# Altium PCB 3d Printer Control PCB.PcbDoc
Units mil, origin at the board's own origin, x right, y up, seen from the top; angles counter-clockwise.
Board outline 6000 x 4000 mil, 2 copper layers (Top Layer, Bottom Layer); 30 components, 35 nets, 131 pads, 56 vias.
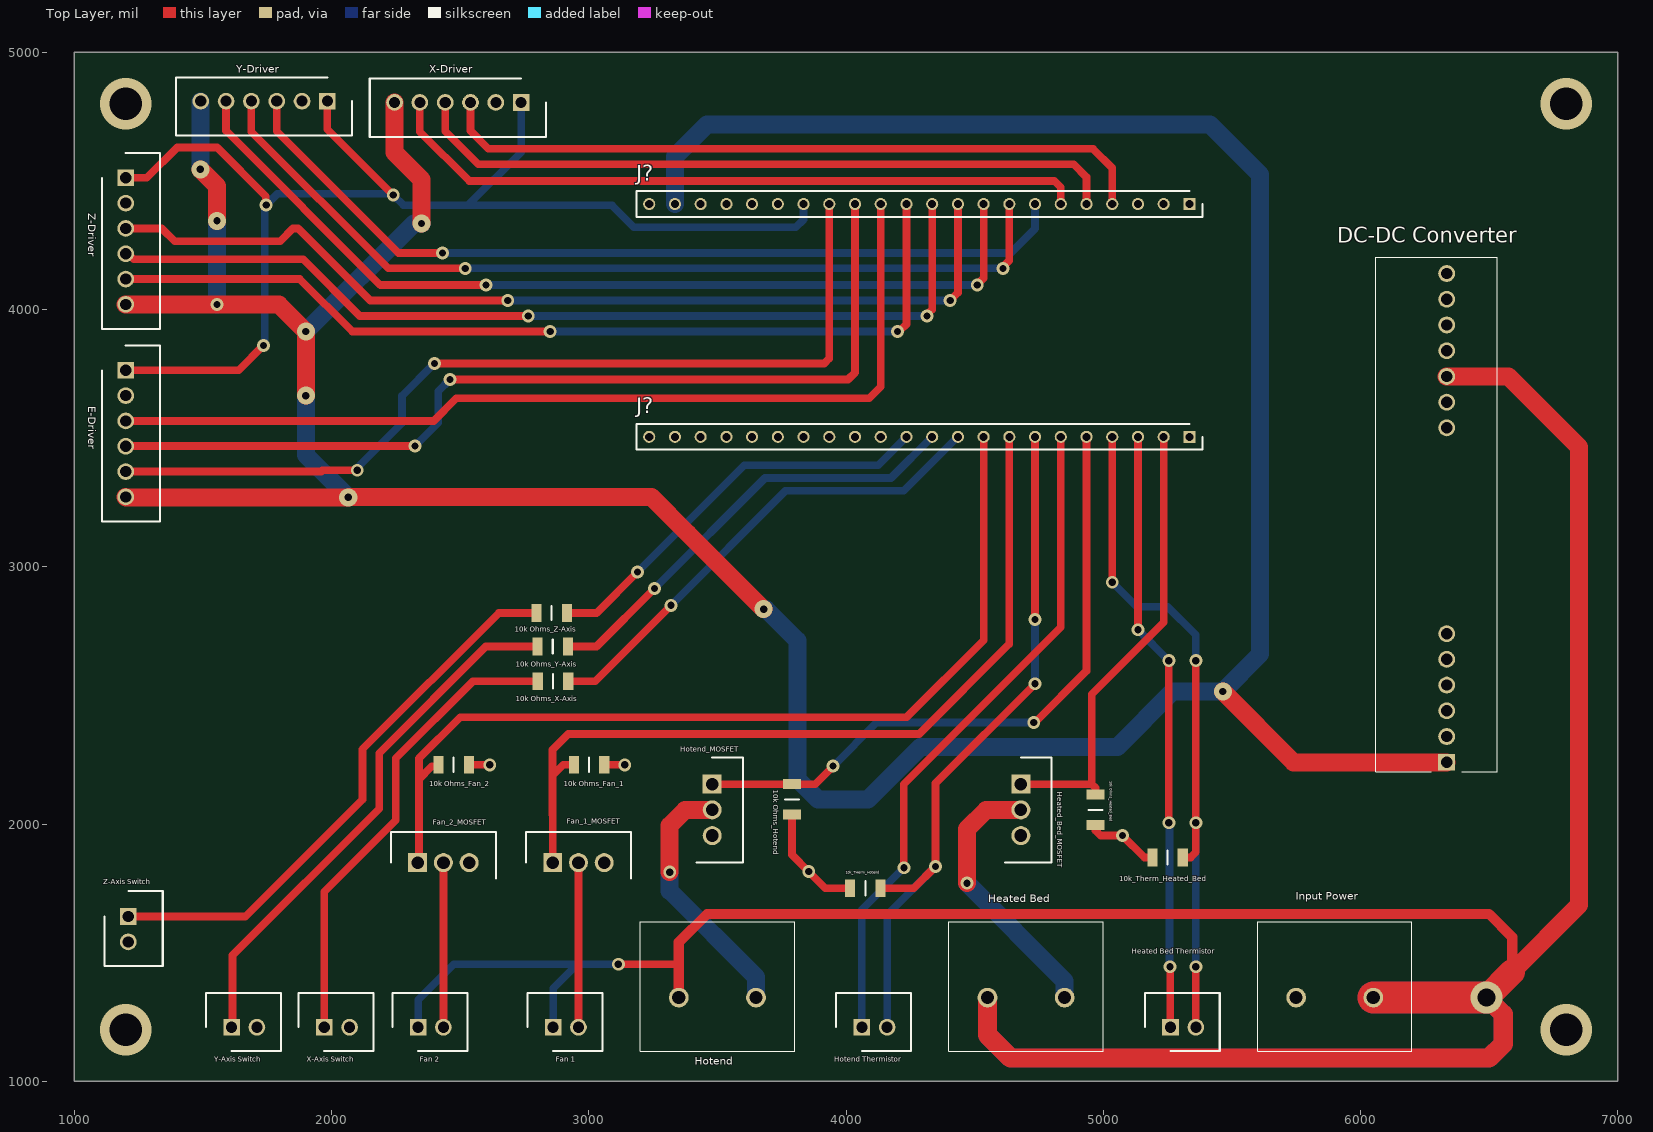
[diagram p0: Top Layer view]
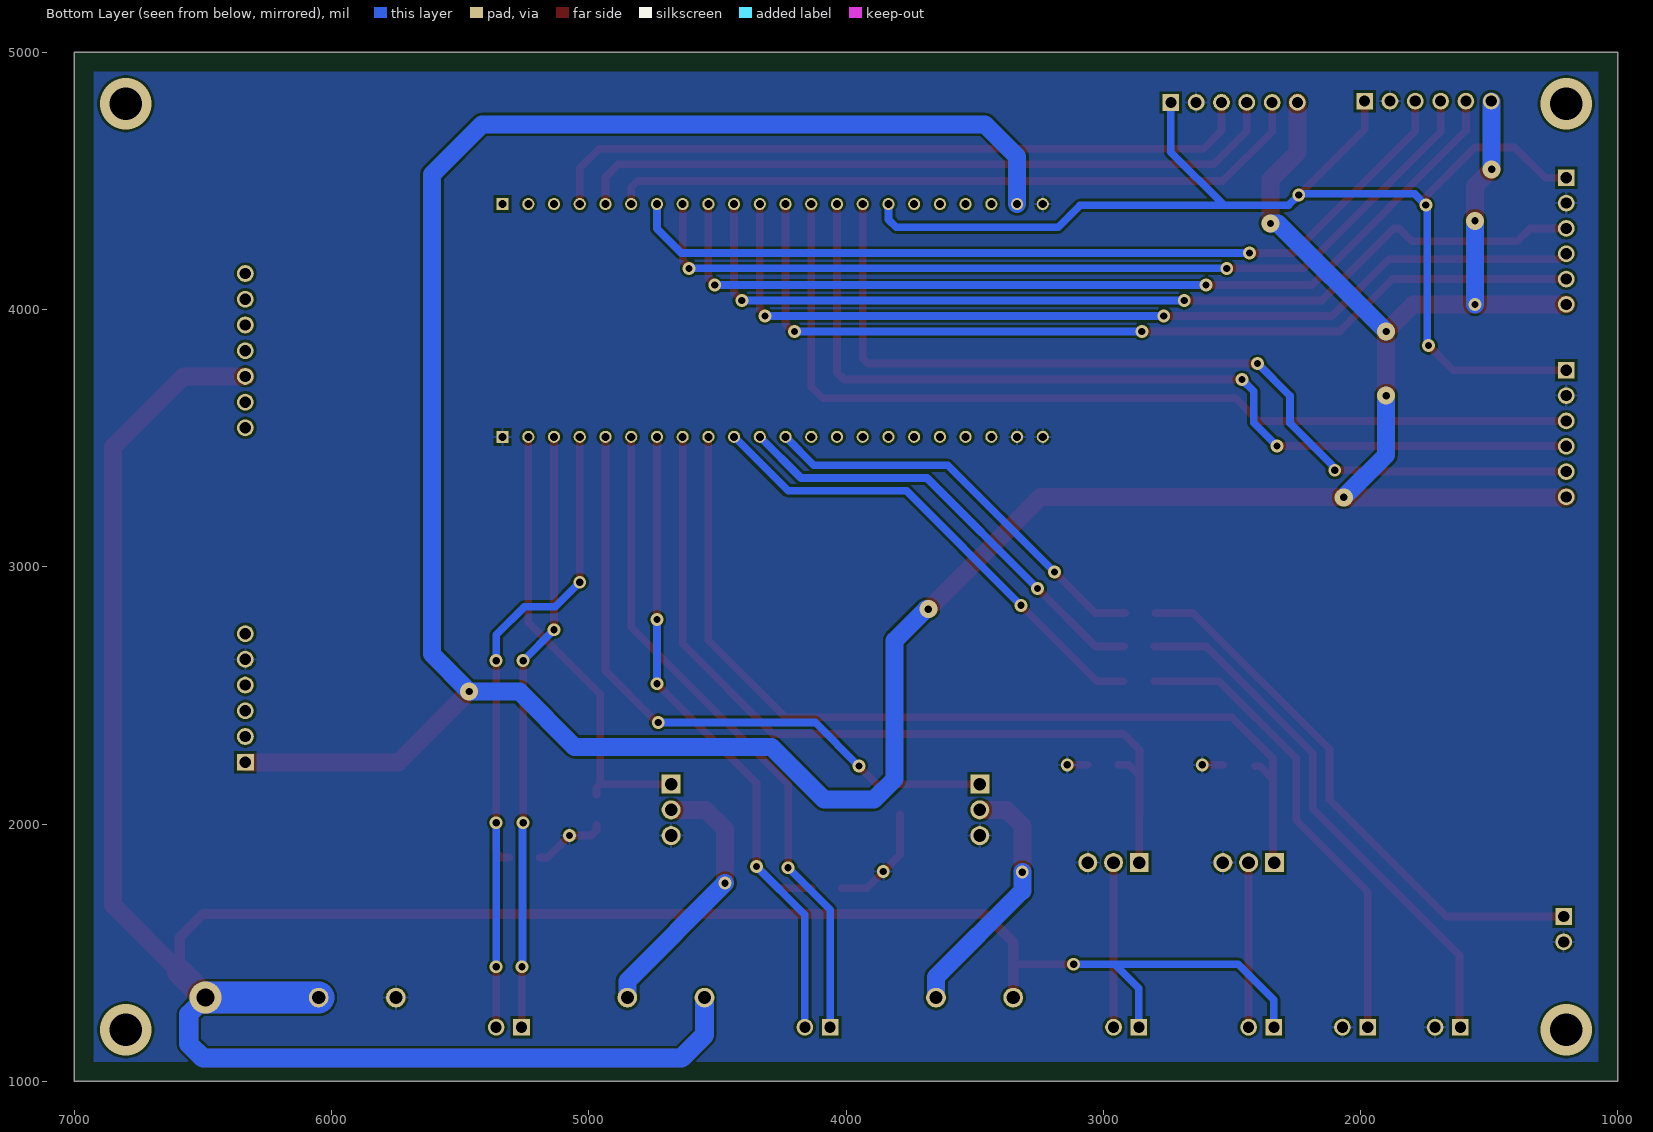
[diagram p1: Bottom Layer view, seen from below]
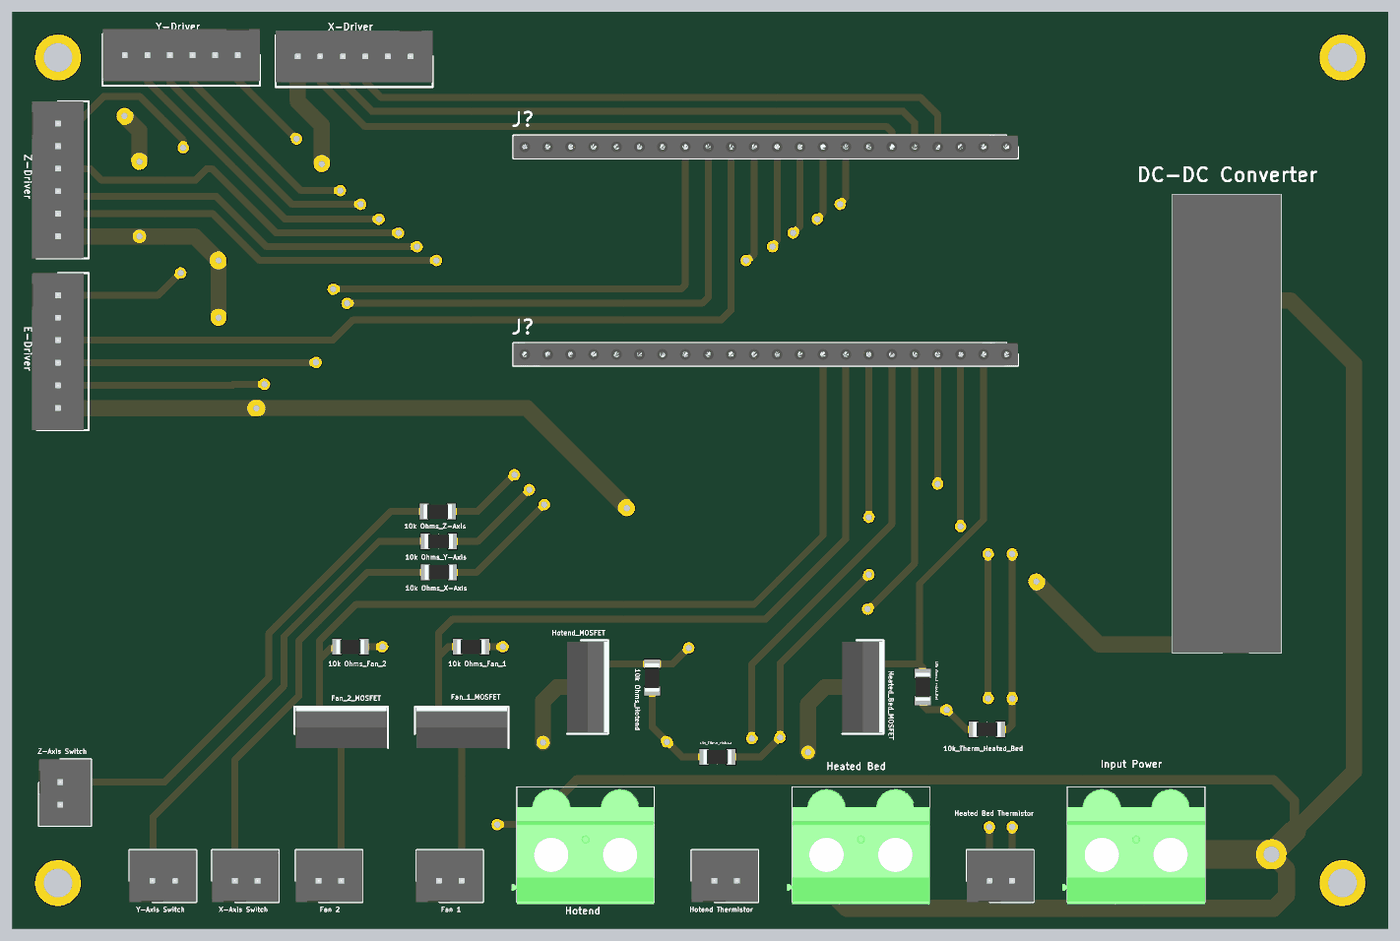
[diagram p2: 3D render of the assembled board from above, using the file's embedded part models]

## Layer stack, top to bottom
Top Solder: solder mask 0.4, Solder Resist, Dk 3.5
Top Layer: signal copper 1.4
Dielectric 1: dielectric 12.6, FR-4, Dk 4.8
Bottom Layer: signal copper 1.4
Bottom Solder: solder mask 0.4, Solder Resist, Dk 3.5

## Board outline
1000,1000 7000,1000 7000,5000 1000,5000

## Design rules (kind name [scope] priority, off if disabled: settings)
Clearance [All] p1: gap=10 ignorepadtopadclearanceinfootprint=FALSE
Height [All] p1: minheight=0 maxheight=99999 prefheight=0
HoleSize [All] p1: absolutevalues=TRUE maxlimit=200 minlimit=1 maxpercent=80.000 minpercent=20.000
PolygonConnect [All] p1: connectstyle=Relief reliefconductorwidth=10 reliefentries=4 polygonreliefangle="90 Angle" airgapwidth=10
RoutingVias [All] p1: holewidth=28 width=50 viastyle="Through Hole" minholewidth=28 minwidth=50 maxholewidth=28 maxwidth=50
SilkToSilkClearance [All] p1: silktosilkclearance=1
SolderMaskExpansion [All] p1: expansion=4 istentingtop=FALSE
Width [All] p1: maxlimit=125 minlimit=5 preferedwidth=30 minimp=50.000000 maximp=50.000000 favimp=50.000000
27 further rules are at their usual default settings.

## Classes and differential pairs
component class "U_Power Distribution": "DC-DC Converter"
component class "U_MCU Board": "10k Ohms_X-Axis" "10k Ohms_Y-Axis" "10k Ohms_Z-Axis" J?
component class "U_Hotend Fan 2": "10k Ohms_Fan_2" Fan_2_MOSFET
component class "U_Hotend Fan 1": "10k Ohms_Fan_1" Fan_1_MOSFET
component class "U_Hotend Controller": "10k Ohms_Hotend" Hotend_MOSFET
component class "U_Heated Bed Controller": "10k Ohms_Heated_Bed" Heated_Bed_MOSFET
component class "Overall Design": 10k_Therm_Heated_Bed 10k_THerm_Hotend E-Driver "Fan 1" "Fan 2" "Heated Bed" "Heated Bed Thermistor" Hotend "Hotend Thermistor" "Input Power" "X-Axis Switch" X-Driver "Y-Axis Switch" Y-Driver "Z-Axis Switch" Z-Driver

## Components (designator, comment, footprint, x,y, rotation, side; value= is the part's Value field where it differs from the comment)
"10k Ohms_Fan_1" "RC1206FR-7W10KL" RESC3116X65N 3000.94,2230 r180 top
"10k Ohms_Fan_2" "RC1206FR-7W10KL" RESC3116X65N 2475,2230 r180 top
"10k Ohms_Heated_Bed" "RC1206FR-7W10KL" RESC3116X65N 4970,2055 r90 top
"10k Ohms_Hotend" "RC1206FR-7W10KL" RESC3116X65N 3790,2095.94 r90 top
"10k Ohms_X-Axis" "RC1206FR-7W10KL" RESC3116X65N 2860.94,2555 r0 top
"10k Ohms_Y-Axis" "RC1206FR-7W10KL" RESC3116X65N 2860,2690 r0 top
"10k Ohms_Z-Axis" "RC1206FR-7W10KL" RESC3116X65N 2855.94,2820 r0 top
10k_Therm_Heated_Bed "RC1206FR-7W10KL" RESC3116X65N 5250,1870 r0 top
10k_THerm_Hotend "RC1206FR-7W10KL" RESC3116X65N 4075,1750 r0 top
"DC-DC Converter" "NID100-5" NID1005 6335,2240 r90 top
E-Driver "B6B-XH-A_LF__SN_" SHDR6W64P0X250_1X6_1740X575X700P 1200,3763.7 r270 top
"Fan 1" "B2B-XH-A_LF__SN_" SHDR2W64P0X250_1X2_740X575X700P 2861.57,1210 r0 top
"Fan 2" "B2B-XH-A_LF__SN_" SHDR2W64P0X250_1X2_740X575X700P 2336.57,1210 r0 top
Fan_1_MOSFET "IPP042N03L_G" TO254P457X1003X2115-3P 2860,1850 r0 top
Fan_2_MOSFET "IPP042N03L_G" TO254P457X1003X2115-3P 2335,1850 r0 top
"Heated Bed" "1732720" 1732720 4550,1325 r0 top
"Heated Bed Thermistor" "B2B-XH-A_LF__SN_" SHDR2W64P0X250_1X2_740X575X700P 5261.57,1210 r0 top
Heated_Bed_MOSFET "IPP042N03L_G" TO254P457X1003X2115-3P 4680,2155 r270 top
Hotend "1732720" 1732720 3350,1325 r0 top
"Hotend Thermistor" "B2B-XH-A_LF__SN_" SHDR2W64P0X250_1X2_740X575X700P 4061.57,1210 r0 top
Hotend_MOSFET "IPP042N03L_G" TO254P457X1003X2115-3P 3480,2155 r270 top
"Input Power" "1732720" 1732720 5750,1325 r0 top
J? "801-87-022-10-001101" RHDR22W60P0X254_1X22_5588X254X700P 5335,4410 r180 top
J? "801-87-022-10-001101" RHDR22W60P0X254_1X22_5588X254X700P 5335,3505 r180 top
"X-Axis Switch" "B2B-XH-A_LF__SN_" SHDR2W64P0X250_1X2_740X575X700P 1971.57,1210 r0 top
X-Driver "B6B-XH-A_LF__SN_" SHDR6W64P0X250_1X6_1740X575X700P 2737.13,4805 r180 top
"Y-Axis Switch" "B2B-XH-A_LF__SN_" SHDR2W64P0X250_1X2_740X575X700P 1611.57,1210 r0 top
Y-Driver "B6B-XH-A_LF__SN_" SHDR6W64P0X250_1X6_1740X575X700P 1983.7,4810 r180 top
"Z-Axis Switch" "B2B-XH-A_LF__SN_" SHDR2W64P0X250_1X2_740X575X700P 1210,1640 r270 top
Z-Driver "B6B-XH-A_LF__SN_" SHDR6W64P0X250_1X6_1740X575X700P 1200,4512.13 r270 top

## Footprints (in the part's own frame and the unit in brackets; to place one, negate y for a bottom-side part, rotate by r counter-clockwise, add the part's x,y. Pads: shape width x height; smd on the part's side, far side on the other; paste and mask are expansions set on the pad)
1732720 [mm]
  round 1.95 hole 1.3: 1(0,0) 2(7.62,0)
  silkscreen extent -3.81,-5.3 11.43,7.5, body extent -4.37,-5.55 11.44,7.25, height 18.83
NID1005 [mm]
  rect 1.665x1.665 hole 1.11: 1(0,0)
  round 1.665 hole 1.11: 2(2.54,0) 3(5.08,0) 4(7.62,0) 5(10.16,0) 6(12.7,0) 7(33.02,0) 8(35.56,0) 9(38.1,0) 10(40.64,0) 11(43.18,0) 12(45.72,0) 13(48.26,0)
  silkscreen extent -0.94,-5 49.86,7, body extent -0.94,-5 49.86,7, height 27.6
RESC3116X65N [mm]
  rect 1x1.75 smd: 1(-1.5,0) 2(1.5,0)
  silkscreen extent 0,-0.7 0,0.7, body extent -1.55,-0.8 1.55,0.8, height 0.65
RHDR22W60P0X254_1X22_5588X254X700P [mm]
  rect 1.2x1.2 hole 0.8: 1(0,0)
  round 1.2 hole 0.8: 2(2.54,0) 3(5.08,0) 4(7.62,0) 5(10.16,0) 6(12.7,0) 7(15.24,0) 8(17.78,0) 9(20.32,0) 10(22.86,0) 11(25.4,0) 12(27.94,0) 13(30.48,0) 14(33.02,0) 15(35.56,0) 16(38.1,0) 17(40.64,0) 18(43.18,0) 19(45.72,0) 20(48.26,0) 21(50.8,0) 22(53.34,0)
  silkscreen extent -1.27,-1.27 54.61,1.27, body extent -1.27,-1.27 54.61,1.27, height 7
SHDR2W64P0X250_1X2_740X575X700P [mm]
  rect 1.65x1.65 hole 1.1: 1(0,0)
  round 1.65 hole 1.1: 2(2.5,0)
  silkscreen extent -2.54,-2.35 4.86,3.4, body extent -2.54,-2.35 4.86,3.4, height 7
SHDR6W64P0X250_1X6_1740X575X700P [mm]
  rect 1.65x1.65 hole 1.1: 1(0,0)
  round 1.65 hole 1.1: 2(2.5,0) 3(5,0) 4(7.5,0) 5(10,0) 6(12.5,0)
  silkscreen extent -2.45,-2.35 14.95,3.4, body extent -2.45,-2.88 14.95,2.88, height 7
TO254P457X1003X2115-3P [mm]
  rect 1.875x1.875 hole 1.25: 1(0,0)
  round 1.875 hole 1.25: 2(2.54,0) 3(5.08,0)
  silkscreen extent -2.64,-1.55 7.72,3.02, body extent -2.47,-1.55 7.55,3.02, height 20.18

## Part data
"10k Ohms_Fan_1" "10k Ohms_Fan_2" "10k Ohms_Heated_Bed" "10k Ohms_Hotend" "10k Ohms_X-Axis" "10k Ohms_Y-Axis" "10k Ohms_Z-Axis" 10k_Therm_Heated_Bed 10k_THerm_Hotend: "Resistor", Manufacturer_Name=KEMET, Arrow Part Number=RC1206FR-7W10KL, Arrow Price/Stock=https://www.arrow.com/en/products/rc1206fr-7w10kl/yageo, Datasheet Link=https://datasheet.datasheetarchive.com/originals/distributors/Datasheets_SAMA/902f9e387b938f871d31120f5fc1d65e.pdf, Height=0.65mm, Manufacturer_Part_Number=RC1206FR-7W10KL
"DC-DC Converter": "Power Supply", Manufacturer_Name="Mean Well", Mouser Part Number=709-NID100-5, Arrow Part Number=NID100-5, Arrow Price/Stock=https://www.arrow.com/en/products/nid100-5/mean-well-enterprises?region=nac, Datasheet Link=https://www.meanwell-web.com/content/files/pdfs/productPdfs/MW/NID100/NID100-spec.pdf, Height=27.5mm, Manufacturer_Part_Number=NID100-5, Mouser Price/Stock=https://www.mouser.co.uk/ProductDetail/MEAN-WELL/NID100-5?qs=u16ybLDytRY%252BLs2ghdXN4Q%3D%3D
E-Driver X-Driver Y-Driver Z-Driver: "Connector", Arrow Part Number=B6B-XH-A(LF)(SN), Manufacturer_Name="JST (JAPAN SOLDERLESS TERMINALS)", Arrow Price/Stock=https://www.arrow.com/en/products/b6b-xh-a-lf-sn/jst-manufacturing?region=europe, Datasheet Link=https://datasheet.lcsc.com/szlcsc/JST-Sales-America-B6B-XH-A-LF-SN_C144397.pdf, Height=7mm, Manufacturer_Part_Number=B6B-XH-A(LF)(SN)
"Fan 1" "Fan 2" "Heated Bed Thermistor" "Hotend Thermistor" "X-Axis Switch" "Y-Axis Switch" "Z-Axis Switch": "Connector", Arrow Part Number=B2B-XH-A(LF)(SN), Manufacturer_Name="JST (JAPAN SOLDERLESS TERMINALS)", Arrow Price/Stock=https://www.arrow.com/en/products/b2b-xh-a-lf-sn/jst-manufacturing?region=europe, Datasheet Link=http://www.jst-mfg.com/product/pdf/eng/eXH.pdf, Height=7mm, Manufacturer_Part_Number=B2B-XH-A(LF)(SN)
Fan_1_MOSFET Fan_2_MOSFET Heated_Bed_MOSFET Hotend_MOSFET: "MOSFET (N-Channel)", Manufacturer_Name=Infineon, Manufacturer_Part_Number="IPP042N03L G", Mouser Part Number=726-IPP042N03LG, Datasheet Link=https://www.infineon.com/dgdl/Infineon-IPP042N03L-DS-v02_00-en.pdf?fileId=db3a30432313ff5e01239ec50f64709d, Height=4.57mm, Mouser Price/Stock=https://www.mouser.co.uk/ProductDetail/Infineon-Technologies/IPP042N03L-G?qs=mzcOS1kGbgcoiRIwFnG3QQ%3D%3D
"Heated Bed" Hotend "Input Power": "Connector", Manufacturer_Name="Phoenix Contact", Mouser Part Number=651-1732720, Arrow Part Number=1732720, Arrow Price/Stock=https://www.arrow.com/en/products/1732720/phoenix-contact, Datasheet Link=https://media.digikey.com/pdf/Data%20Sheets/Phoenix%20Contact%20PDFs/1732720.pdf, Height=18mm, Manufacturer_Part_Number=1732720, Mouser Price/Stock=https://www.mouser.co.uk/ProductDetail/Phoenix-Contact/1732720?qs=DAHzmYU9cu2maJEX8AM1Kg%3D%3D
J? J?: "Connector", Manufacturer_Name=Preci-Dip, Datasheet Link=https://www.precidip.com/pview/801-PP-NNN-10-001101.html, Height=7mm, Manufacturer_Part_Number=801-87-022-10-001101

## Via types
v1: diameter 50, hole 28, Top Layer to Bottom Layer, 43 vias
v2: diameter 70, hole 28, Top Layer to Bottom Layer, 8 vias
v3: diameter 200, hole 125, Top Layer to Bottom Layer, 4 vias
v4: diameter 125, hole 70, Top Layer to Bottom Layer, 1 vias

## Nets (pads, with @x,y where several pads share a name; then routed paths per layer and width w, separated by ;. In a path a pad name is that pad's centre, name@x,y a point inside that pad or via, vN(x,y) a via of type N, cw(c..) or ccw(c..) an arc to the next point about the centre after c; other vN are vias at no path point)
GND: 10k_Therm_Heated_Bed.1 10k_THerm_Hotend.1 "10k Ohms_Fan_1.1" "10k Ohms_Fan_2.1" "10k Ohms_Heated_Bed.1" "10k Ohms_Hotend.1" "DC-DC Converter.5" "Input Power.1" "X-Axis Switch.2" "Y-Axis Switch.2" "Z-Axis Switch.2" E-Driver.2 Fan_1_MOSFET.3 Fan_2_MOSFET.3 Heated_Bed_MOSFET.3 Hotend_MOSFET.3 J?.1@5335,3505 J?.21@3335,3505 J?.22 X-Driver.2 Y-Driver.2 Z-Driver.2 | length 884.3
  Top Layer w10: 2534.06,2230 2535,2229.06
  Top Layer w30: 2534.06,2230 v1(2615,2230) ; 3060,2230 v1(3140,2230) ; 3790,2036.89 3790,1880 v1(3855,1815) 3920,1750 10k_THerm_Hotend.1 ; 4970,1995.94 4970,1975 4990,1955 v1(5075,1955) 5160,1870 10k_Therm_Heated_Bed.1
"Net10k Ohms_Fan_1_2": "10k Ohms_Fan_1.2" Fan_1_MOSFET.1 J?.8@4635,3505 | length 3290.6
  Top Layer w10: 2859.14,2035.95 2860,2035.1
  Top Layer w30: 2859.14,2035.95 2859.14,2189.14 ; Fan_1_MOSFET.1 2860,2035.1 ; 2941.89,2230 2941.37,2230.52 2900.52,2230.52 2859.14,2189.14 ; J?.8@4635,3505 4635,2700 4285,2350 2920,2350 2859.14,2289.14 2859.14,2189.14
"Net10k Ohms_Fan_2_2": "10k Ohms_Fan_2.2" Fan_2_MOSFET.1 J?.9@4535,3505 | length 3681.3
  Top Layer w10: Fan_2_MOSFET.1 Fan_2_MOSFET.1@2340,1855 ; 2410.94,2225 2415.94,2230
  Top Layer w30: Fan_2_MOSFET.1@2340,1855 2340,2175 ; 2410.94,2225 2390,2225 2340,2175 ; J?.9@4535,3505 4535,2715 4235,2415 2500,2415 2340,2255 2340,2175
"Net10k Ohms_Heated_Bed_2": "10k Ohms_Heated_Bed.2" Heated_Bed_MOSFET.1 J?.2@5235,3505 | length 1788.1
  Top Layer w30: Heated_Bed_MOSFET.1 4955,2155 ; 4970,2114.06 4970,2140 4955,2155 ; J?.2@5235,3505 5235,2784.29 4955,2504.29 4955,2155
"Net10k Ohms_Hotend_2": "10k Ohms_Hotend.2" Hotend_MOSFET.1 J?.5@4935,3505 | length 2553
  Top Layer w10: v1@3950,2219.29 v1(3950,2225)
  Top Layer w30: Hotend_MOSFET.1 3790,2155 3880,2155 v1(3950,2225) ; v1(4730,2395) 4735,2395 4935,2595 J?.5@4935,3505
  Bottom Layer w30: v1(3950,2225) 4120,2395 v1(4730,2395)
"Net10k Ohms_X-Axis_1": "10k Ohms_X-Axis.1" "X-Axis Switch.1" | length 1836.5
  Top Layer w30: 1971.57,1210 1971.57,1736.57 2250,2015 2250,2255 2550,2555 2801.89,2555
"Net10k Ohms_X-Axis_2": "10k Ohms_X-Axis.2" J?.10@4435,3505 | length 1908.5
  Top Layer w30: 2920,2555 3025,2555 v1(3320,2850)
  Bottom Layer w30: v1(3320,2850) 3765,3295 4225,3295 J?.10@4435,3505
"Net10k Ohms_Y-Axis_1": "10k Ohms_Y-Axis.1" "Y-Axis Switch.1" | length 2090.4
  Top Layer w10: 1611.57,1210 1615,1213.43
  Top Layer w30: 1615,1213.43 1615,1490 2185,2060 2185,2275 2600,2690 2800.94,2690
"Net10k Ohms_Y-Axis_2": "10k Ohms_Y-Axis.2" J?.11@4335,3505 | length 1753.5
  Top Layer w30: 2919.06,2690 3030,2690 v1(3255,2915)
  Bottom Layer w30: v1(3255,2915) 3685,3345 4175,3345 J?.11@4335,3505
"Net10k Ohms_Z-Axis_1": "10k Ohms_Z-Axis.1" "Z-Axis Switch.1" | length 2192.1
  Top Layer w30: 1210,1640 1665,1640 2120,2095 2120,2290 2650,2820 2796.89,2820
  Bottom Layer w10: 1210,1640 1211.57,1641.57
"Net10k Ohms_Z-Axis_2": "10k Ohms_Z-Axis.2" J?.12@4235,3505 | length 1603.7
  Top Layer w30: 2915,2820 3030,2820 v1(3190,2980)
  Bottom Layer w30: v1(3190,2980) 3605,3395 4125,3395 J?.12@4235,3505
Net10k_Therm_Heated_Bed_1: 
Net10k_Therm_Heated_Bed_2: 10k_Therm_Heated_Bed.2 "Heated Bed Thermistor.2" J?.4@5035,3505 | length 2674.1
  Top Layer w30: v1(5035,2940) J?.4@5035,3505 ; 10k_Therm_Heated_Bed.2 5340,1870 5360,1890 v1(5360,2005) v1(5360,2635) ; 5360,1210 v1(5360,1445)
  Bottom Layer w30: v1(5035,2940) 5130,2845 5250,2845 5360,2735 v1(5360,2635) ; v1(5360,1445) v1(5360,2005)
Net10k_THerm_Hotend_2: 10k_THerm_Hotend.2 "Hotend Thermistor.2" J?.7@4735,3505 | length 2782.4
  Top Layer w30: 10k_THerm_Hotend.2 4263.35,1750 v1(4348.13,1834.78) 4348.13,2158.13 v1(4735,2545) ; v1(4735,2795) J?.7@4735,3505
  Bottom Layer w30: 4160,1210 4160,1646.65 v1(4348.13,1834.78) ; v1(4735,2545) v1(4735,2795)
"NetDC-DC Converter_1": "DC-DC Converter.1" E-Driver.6 J?.21@3335,4410 X-Driver.6 Y-Driver.6 Z-Driver.6 | length 14316.2
  Top Layer w10: 3385,3130 3390.2,3135.2
  Top Layer w70: E-Driver.6 1201.57,3270 v2(2065,3270) 2066.57,3271.57 3243.43,3271.57 3385,3130 v2(3680,2835) ; Z-Driver.6 v1(1555,4020) 1795,4020 v2(1900,3915) v2(1900,3665) ; v2(1490,4545) 1555,4480 v2(1555,4345) ; X-Driver.6 2245,4610 2350,4505 v2(2350,4335) ; v2(5465,2515) 5740,2240 6335,2240
  Bottom Layer w10: v2(1490,4545) v2@1490.79,4545.79 ; Y-Driver.6@1490.79,4809.21 Y-Driver.6 ; v2@2044.22,3282.86 2052.14,3282.86 v2(2065,3270)
  Bottom Layer w70: v2@1490.79,4545.79 Y-Driver.6@1490.79,4809.21 ; v1(1555,4020) v2(1555,4345) ; v2(1900,3665) 1900,3435 v2@2052.14,3282.86 ; v2(1900,3915) 2320,4335 v2(2350,4335) ; J?.21@3335,4410 3335,4595 3460,4720 5415,4720 5610,4525 5610,2660 v2(5465,2515) 5270,2515 5055,2300 4290,2300 4085,2095 3891.01,2095 3810.5,2175.5 3810.5,2713.02 3688.52,2835 v2(3680,2835)
"NetDC-DC Converter_9": "DC-DC Converter.9" "Fan 1.1" "Fan 2.1" "Heated Bed.1" "Input Power.2" Hotend.1 | length 13767.9
  Top Layer w10: 3345,1455 3350,1450
  Top Layer w30: v1(3115,1455) 3345,1455
  Top Layer w40: Hotend.1 3350,1450 3350,1540 3460,1650 6500,1650 6590,1560 6590,1425
  Top Layer w70: 6335,3740 6575,3740 6850,3465 6850,1685 6590,1425
  Top Layer w75: 4550,1325 4550,1180 4640,1090 6500,1090 6555,1145 6555,1260 v4(6490,1325)
  Top Layer w100: v4(6490,1325) 6590,1425
  Top Layer w125: 6050,1325 v4(6490,1325)
  Bottom Layer w30: 2336.57,1210 2336.57,1316.57 2475,1455 2955,1455 ; 2861.57,1210 2861.57,1361.57 2955,1455 ; v1(3115,1455) 2955,1455
  Bottom Layer w75: 4550,1325 4550,1180 4640,1090 6500,1090 6555,1145 6555,1260 v4(6490,1325)
  Bottom Layer w125: 6050,1325 v4(6490,1325)
NetE-Driver_1: E-Driver.1 J?.16@3835,4410 X-Driver.1 Y-Driver.1 Z-Driver.1 | length 5022.8
  Top Layer w10: v1@1744.82,4407.12 v1(1745.91,4406.03)
  Top Layer w30: E-Driver.1 1638.7,3763.7 v1(1735,3860) ; Z-Driver.1 1282.13,4512.13 1400,4630 1555,4630 1744.82,4440.18 v1@1744.82,4407.12 ; Y-Driver.1 1983.7,4701.3 v1(2240,4445)
  Bottom Layer w10: v1(1735,3860) v1@1740.46,3865.46
  Bottom Layer w30: v1@1740.46,3865.46 1740.46,4400.58 v1(1745.91,4406.03) 1789.88,4450 2235,4450 v1(2240,4445) 2280,4405 2530,4405 ; X-Driver.1 2737.13,4612.13 2530,4405 ; J?.16@3835,4410 3835,4350 3805,4320 3175,4320 3090,4405 2530,4405
NetE-Driver_3: E-Driver.3 J?.13@4135,4410 | length 3700.2
  Top Layer w30: E-Driver.3 2396.85,3566.85 2485,3655 4090,3655 4135,3700 J?.13@4135,4410
NetE-Driver_4: E-Driver.4 J?.14@4035,4410 | length 3680.3
  Top Layer w30: E-Driver.4 1200.79,3469.21 2324.21,3469.21 v1(2325,3470) ; v1(2460.57,3727.84) 4007.84,3727.84 4035,3755 J?.14@4035,4410
  Bottom Layer w30: v1(2325,3470) 2415,3560 2415,3682.27 v1(2460.57,3727.84)
NetE-Driver_5: E-Driver.5 J?.15@3935,4410 | length 3584.6
  Top Layer w30: E-Driver.5 1960,3370 1965,3375 v1(2100,3375) ; v1(2400,3790) 3915,3790 3935,3810 J?.15@3935,4410
  Bottom Layer w30: v1(2100,3375) 2100,3380.41 2110,3390.41 2110,3395 2274.3,3559.3 2274.3,3664.3 v1(2400,3790)
"NetFan 1_2": "Fan 1.2" Fan_1_MOSFET.2 | length 640
  Top Layer w30: 2960,1210 Fan_1_MOSFET.2
"NetFan 2_2": "Fan 2.2" Fan_2_MOSFET.2 | length 640
  Top Layer w30: 2435,1210 Fan_2_MOSFET.2
"NetHeated Bed Thermistor_1": "Heated Bed Thermistor.1" J?.3@5135,3505 | length 2347.4
  Top Layer w10: 5260,1211.57 5261.57,1210
  Top Layer w30: v1(5135,2755) J?.3@5135,3505 ; v1(5255,2005) v1(5255,2635) ; 5260,1211.57 v1(5260,1445)
  Bottom Layer w10: v1(5255,2005) v1@5257.5,2002.5 ; v1@5257.5,1447.5 v1(5260,1445)
  Bottom Layer w30: v1(5135,2755) v1(5255,2635) ; v1@5257.5,1447.5 v1@5257.5,2002.5
"NetHeated Bed_2": "Heated Bed.2" Heated_Bed_MOSFET.2 | length 1053.5
  Top Layer w70: v1(4470,1770) 4470,1980 4545,2055 Heated_Bed_MOSFET.2
  Bottom Layer w70: v1(4470,1770) 4850,1390 4850,1325
"NetHotend Thermistor_1": "Hotend Thermistor.1" J?.6@4835,3505 | length 2615.4
  Top Layer w30: v1(4225,1830) 4225,2155 4835,2765 J?.6@4835,3505
  Bottom Layer w30: 4061.57,1210 4061.57,1666.57 v1(4225,1830)
NetHotend_2: Hotend.2 Hotend_MOSFET.2 | length 998.9
  Top Layer w70: v1(3314.65,1812.7) 3314.65,1994.65 3375,2055 Hotend_MOSFET.2
  Bottom Layer w70: v1(3314.65,1812.7) 3314.65,1740.35 3650,1405 Hotend.2
NetJ?_4: J?.4@5035,4410 X-Driver.3 | length 2804.9
  Top Layer w30: X-Driver.3 2540.28,4694.72 2610,4625 4960,4625 5035,4550 J?.4@5035,4410
NetJ?_5: J?.5@4935,4410 X-Driver.4 | length 2783.8
  Top Layer w30: X-Driver.4 2441.85,4693.15 2570,4565 4885,4565 4935,4515 J?.5@4935,4410
NetJ?_6: J?.6@4835,4410 X-Driver.5 | length 2759.7
  Top Layer w30: X-Driver.5 2343.43,4691.57 2535,4500 4810,4500 4835,4475 J?.6@4835,4410
NetJ?_7: J?.7@4735,4410 Y-Driver.3 | length 3395.9
  Top Layer w30: Y-Driver.3 1786.85,4693.15 2260,4220 2430.42,4220 v1(2431.06,4219.36)
  Bottom Layer w30: v1(2431.06,4219.36) 4639.36,4219.36 4735,4315 J?.7@4735,4410
NetJ?_8: J?.8@4635,4410 Y-Driver.4 | length 3520.5
  Top Layer w30: Y-Driver.4 1688.43,4691.57 2220,4160 v1(2520,4160) ; v1(4610,4160) 4610,4165.41 4635,4190.41 J?.8@4635,4410
  Bottom Layer w30: v1(2520,4160) v1(4610,4160)
NetJ?_9: J?.9@4535,4410 Y-Driver.5 | length 3608.9
  Top Layer w30: Y-Driver.5 1590,4695 2190,4095 v1(2600,4095) ; v1(4510,4095) 4510,4097.57 4535,4122.57 J?.9@4535,4410
  Bottom Layer w30: v1(2600,4095) v1(4510,4095)
NetJ?_10: J?.10@4435,4410 Z-Driver.3 | length 3750.2
  Top Layer w30: Z-Driver.3 1200.28,4315 1340,4315 1390,4265 1800,4265 1850.28,4315.28 1869.72,4315.28 2150,4035 v1(2685,4035) ; v1(4405,4035) 4435,4065 J?.10@4435,4410
  Bottom Layer w30: v1(2685,4035) v1(4405,4035)
NetJ?_11: J?.11@4335,4410 Z-Driver.4 | length 3658.5
  Top Layer w30: Z-Driver.4 1209.46,4216.85 1231.31,4195 1890,4195 2110,3975 v1(2765,3975) ; v1(4315,3975) 4315,3980.41 4335,4000.41 J?.11@4335,4410
  Bottom Layer w30: v1(2765,3975) v1(4315,3975)
NetJ?_12: J?.12@4235,4410 Z-Driver.5 | length 3598.1
  Top Layer w30: Z-Driver.5 1876.57,4118.43 2080,3915 v1(2850,3915) ; v1(4200,3915) 4203.83,3918.83 4211.25,3918.83 4235,3942.57 J?.12@4235,4410
  Bottom Layer w30: v1(2850,3915) v1(4200,3915)
pads on no net: "DC-DC Converter.2" "DC-DC Converter.3" "DC-DC Converter.4" "DC-DC Converter.6" "DC-DC Converter.7" "DC-DC Converter.8" "DC-DC Converter.10" "DC-DC Converter.11" "DC-DC Converter.12" "DC-DC Converter.13" J?.1@5335,4410 J?.2@5235,4410 J?.3@5135,4410 J?.13@4135,3505 J?.14@4035,3505 J?.15@3935,3505 J?.16@3835,3505 J?.17 J?.18 J?.19 J?.20
copper on no net:
  other v3: 1200,1200 6800,1200 1200,4800 6800,4800

## Polygon pours and split planes (outlines as drawn)
GND on Bottom Layer "GND_L02_P000" (solid, pour order 0): 1075,1075 6925,1075 6925,4925 1075,4925